# EAGLE board PCB h bridge (EAGLE 9.5.1)
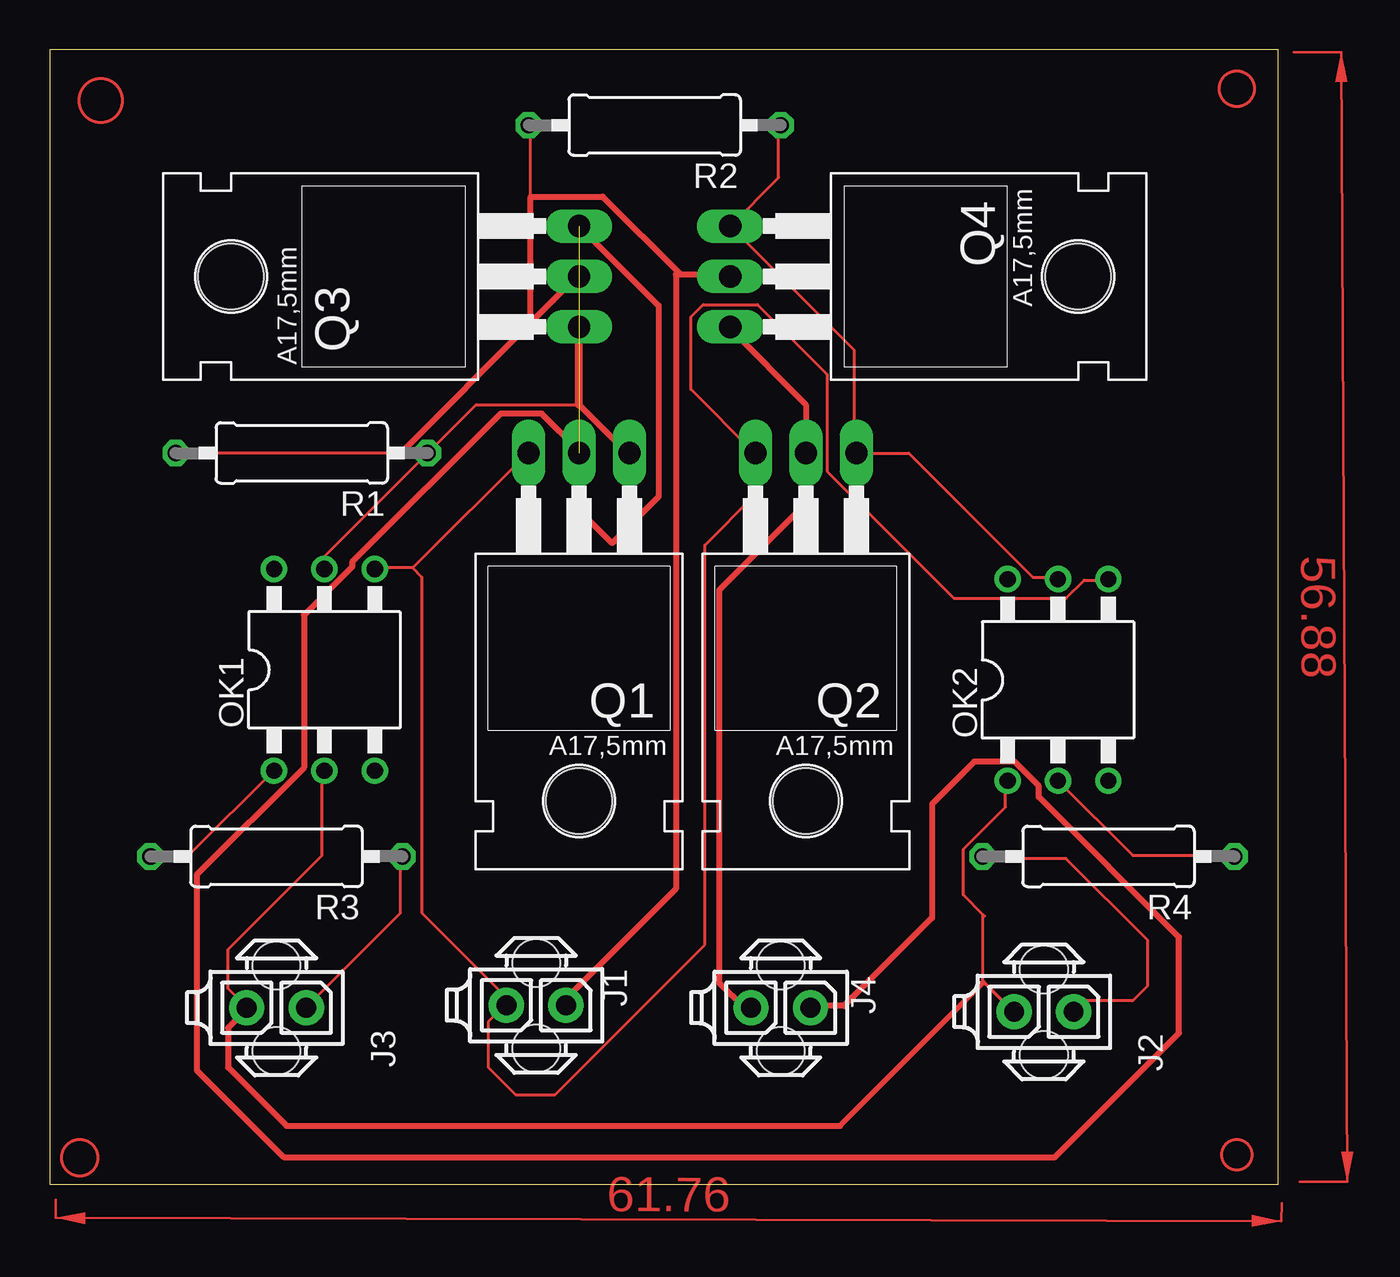
[diagram p0: board, top side]

Size 61.9 x 57.14 mm. Coordinates in mm from the lower left corner, seen from the top.
Outline: 0,0 61.9,0 61.9,57.14 0,57.14 0,0
Copper layers (1*16): Top 0.035mm / dielectric 1.5mm / Bottom 0.035mm
Design rules "default": minimum track width 6mil, minimum drill 0.35mm, track to track 6mil, track to pad 6mil, pad to pad 6mil, via to via 6mil, smd to smd 6mil, copper to edge 40mil, drill to drill 6mil, minimum pad ring 10mil, minimum via ring 8mil, stop-mask expansion 4mil, vias tented up to drill 0mil, thermal gap 10mil

## Footprints (pad centres in the part's own frame; a part is rotated, then mirrored left to right if it is on the bottom)
794681-2 = drill 1 pad 1.778: 1 0,-1.5; 2 0,1.5 | hole 2.4: 2.13,0; -2.17,0
DIL6-04 = drill 0.813: 1 -2.54,-5.08; 2 0,-5.08; 3 2.54,-5.08; 4 2.54,5.08; 5 0,5.08; 6 -2.54,5.08
TO220 = drill 1.118 long: 1 -2.54,-6.35; 2 0,-6.35; 3 2.54,-6.35 | hole 3.302: 0,11.176
0309/12 = drill 0.813 octagon: 1 -6.35,0; 2 6.35,0

## Placement (x,y rotation side)
J1  794681-2  [794681-2]  24.51,9.02 90 top
J2  794681-2  [794681-2]  50.09,8.69 90 top
J3  794681-2  [794681-2]  11.43,8.89 90 top
J4  794681-2  [794681-2]  36.83,8.89 90 top
OK1  H11A1TM  [DIL6-04]  13.84,25.91 0 top
OK2  H11A1TM  [DIL6-04]  50.8,25.4 0 top
Q1  IRF840  [TO220]  26.67,30.48 180 top
Q2  IRF840  [TO220]  38.1,30.48 180 top
Q3  IRF9530  [TO220]  20.32,45.72 90 top
Q4  IRF9530  [TO220]  40.64,45.72 270 top
R1  [0309/12]  12.7,36.83 180 top
R2  [0309/12]  30.48,53.34 180 top
R3  [0309/12]  11.43,16.51 180 top
R4  [0309/12]  53.34,16.51 180 top

## Library data of the parts
J1-J4 = con-amp
OK1 OK2 = optocoupler; MF: FAIRCHILD SEMICONDUCTOR; MPN: H11A1TV-M; OC_FARNELL: unknown; OC_NEWARK: 05C2394
Q1-Q4 = transistor-fet
R1-R4 = rcl; SPICEPREFIX: R

## Nets
N$1: J1.1 Q3.2 Q4.2 R1.2 R2.2
N$3: J1.2 OK1.4 OK2.4 Q1.3 Q2.3
N$4: J4.2 Q2.2 Q4.3
N$5: OK2.5 Q2.1 Q4.1 R2.1
N$6: OK1.5 Q1.1 Q3.1 R1.1
N$7: OK2.2 R4.1
N$8: J2.1 R4.2
N$9: J2.2 J3.2 OK1.2 OK2.1
N$10: J3.1 R3.1
N$11: OK1.1 R3.2
N$12: J4.1 Q1.2 Q3.3

## Tracks (layer width: path | path; a pad name or v marks a point on that pad's centre or on a via)
N$1
  Top 0.152: 17.68,36.83 R1.2 | 24.23,49.74 24.23,53.29 R2.2 | 26.67,45.82 Q3.2 | 34.29,45.82 Q4.2 | 26.06,9.4 26.06,9.09 J1.1
  Top 0.305: 26.67,45.82 25.37,44.52 24.29,43.44 | 24.29,43.44 17.68,36.83 | 24.29,43.44 24.23,43.5 24.23,49.74 27.86,49.74 31.78,45.82 | 31.78,45.82 31.55,45.82 31.55,14.88 26.06,9.4 | 31.78,45.82 34.29,45.82
N$3
  Top 0.152: 35.51,36.83 32.31,40.03 32.31,43.69 32.92,44.3 35.66,44.3 39.17,40.79 39.17,35.92 45.57,29.52 51.21,29.52 52.12,30.43 53.34,30.43 OK2.4 | 18.29,31.04 16.46,31.04 OK1.4 | 18.29,31.04 24.08,36.83 Q1.3 | 18.29,31.04 18.75,30.58 18.75,13.66 22.86,9.55 22.86,9.09 J1.2 22.86,8.94 22.1,8.18 22.1,5.89 23.47,4.52 25.45,4.52 33.01,12.07 33.01,32.19 35.51,34.7 35.51,36.83 | 35.51,36.83 Q2.3
N$4
  Top 0.152: 34.29,43.08 Q4.3
  Top 0.305: 34.29,43.08 38.1,39.27 Q2.2 38.1,34.29 33.73,29.92 33.73,10.16 35,8.89 J4.2
N$5
  Top 0.152: R2.1 36.73,53.29 36.73,50.7 Q4.1 40.54,42.01 40.54,36.83 Q2.1 43.28,36.83 49.53,30.58 50.75,30.58 OK2.5
N$6
  Top 0.152: 29.11,36.83 Q1.1 | OK1.5 13.87,31.04 13.87,31.65 R1.1 21.49,39.27 26.67,39.27
  Top 0.305: 29.11,36.83 26.67,39.27
  Top 0.406: 26.67,39.27 Q3.1
N$7
  Top 0.152: OK2.2 54.56,16.56 59.59,16.56 R4.1
N$8
  Top 0.152: R4.2 47.09,16.41 51.21,16.41 55.32,12.29 55.32,10.01 54.56,9.25 52.14,9.25 J2.1
N$9
  Top 0.152: 47.04,10.17 48.52,8.69 J2.2 47.02,10.26 47.02,13.58 | 47.09,13.51 47.02,13.58 | 47.02,13.58 46.02,14.58 46.02,16.87 48.16,19 48.16,20.22 OK2.1 | OK1.2 13.72,20.83 13.72,16.56 8.99,11.84 8.99,9.86 9.91,8.94 J3.2 9.91,8.79
  Top 0.254: 39.82,2.95 47.04,10.17
  Top 0.305: 39.82,2.95 11.94,2.95 8.99,5.89 8.99,7.87 9.91,8.79
N$10
  Top 0.152: R3.1 17.68,16.41 17.68,13.66 12.95,8.94 J3.1
N$11
  Top 0.152: R3.2 5.18,16.56 7.01,16.56 11.28,20.83 OK1.1
N$12  (1 unrouted)
  Top 0.305: Q3.3 30.68,44.25 30.68,34.63 28.34,32.29 26.72,33.91 26.72,36.88 26.67,36.93 24.79,38.81 22.72,38.81 15.25,31.34 15.25,31.11 12.81,28.67 12.81,20.99 7.42,15.6 7.42,5.74 11.79,1.37 50.65,1.37 56.9,7.62 56.9,12.45 49.84,19.51 49.84,20.07 48.62,21.29 46.58,21.29 44.45,19.15 44.45,13.42 40.02,8.99 38.43,8.99 J4.1
(copper drawn outside any net)
  shapes: Top area x2, Top circle x4